# Altium PCB board.pcbdoc
Units mil, origin at the board's own origin, x right, y up, seen from the top; angles counter-clockwise.
Board outline 4446.21 x 3318.85 mil, 2 copper layers (Top Layer, Bottom Layer); 11 components, 21 nets, 99 pads, 5 vias.
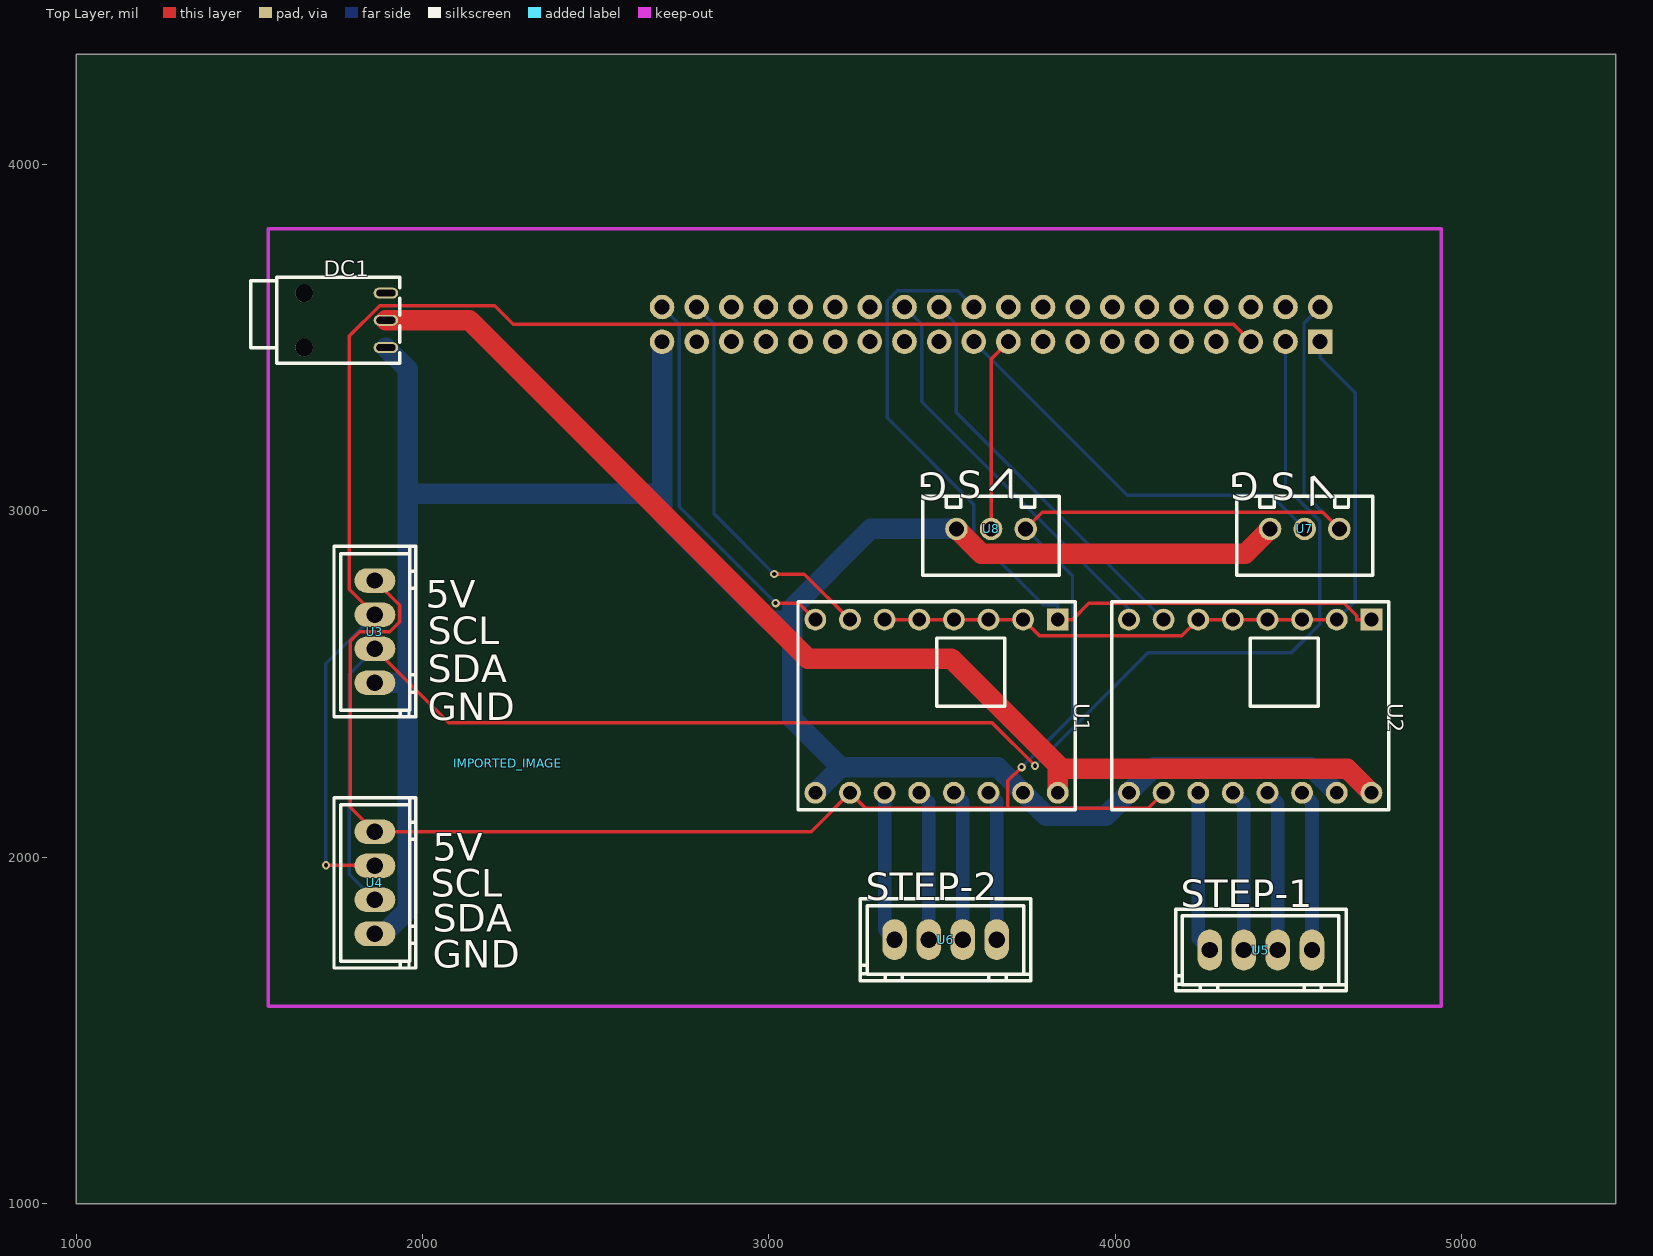
[diagram p0: Top Layer view]
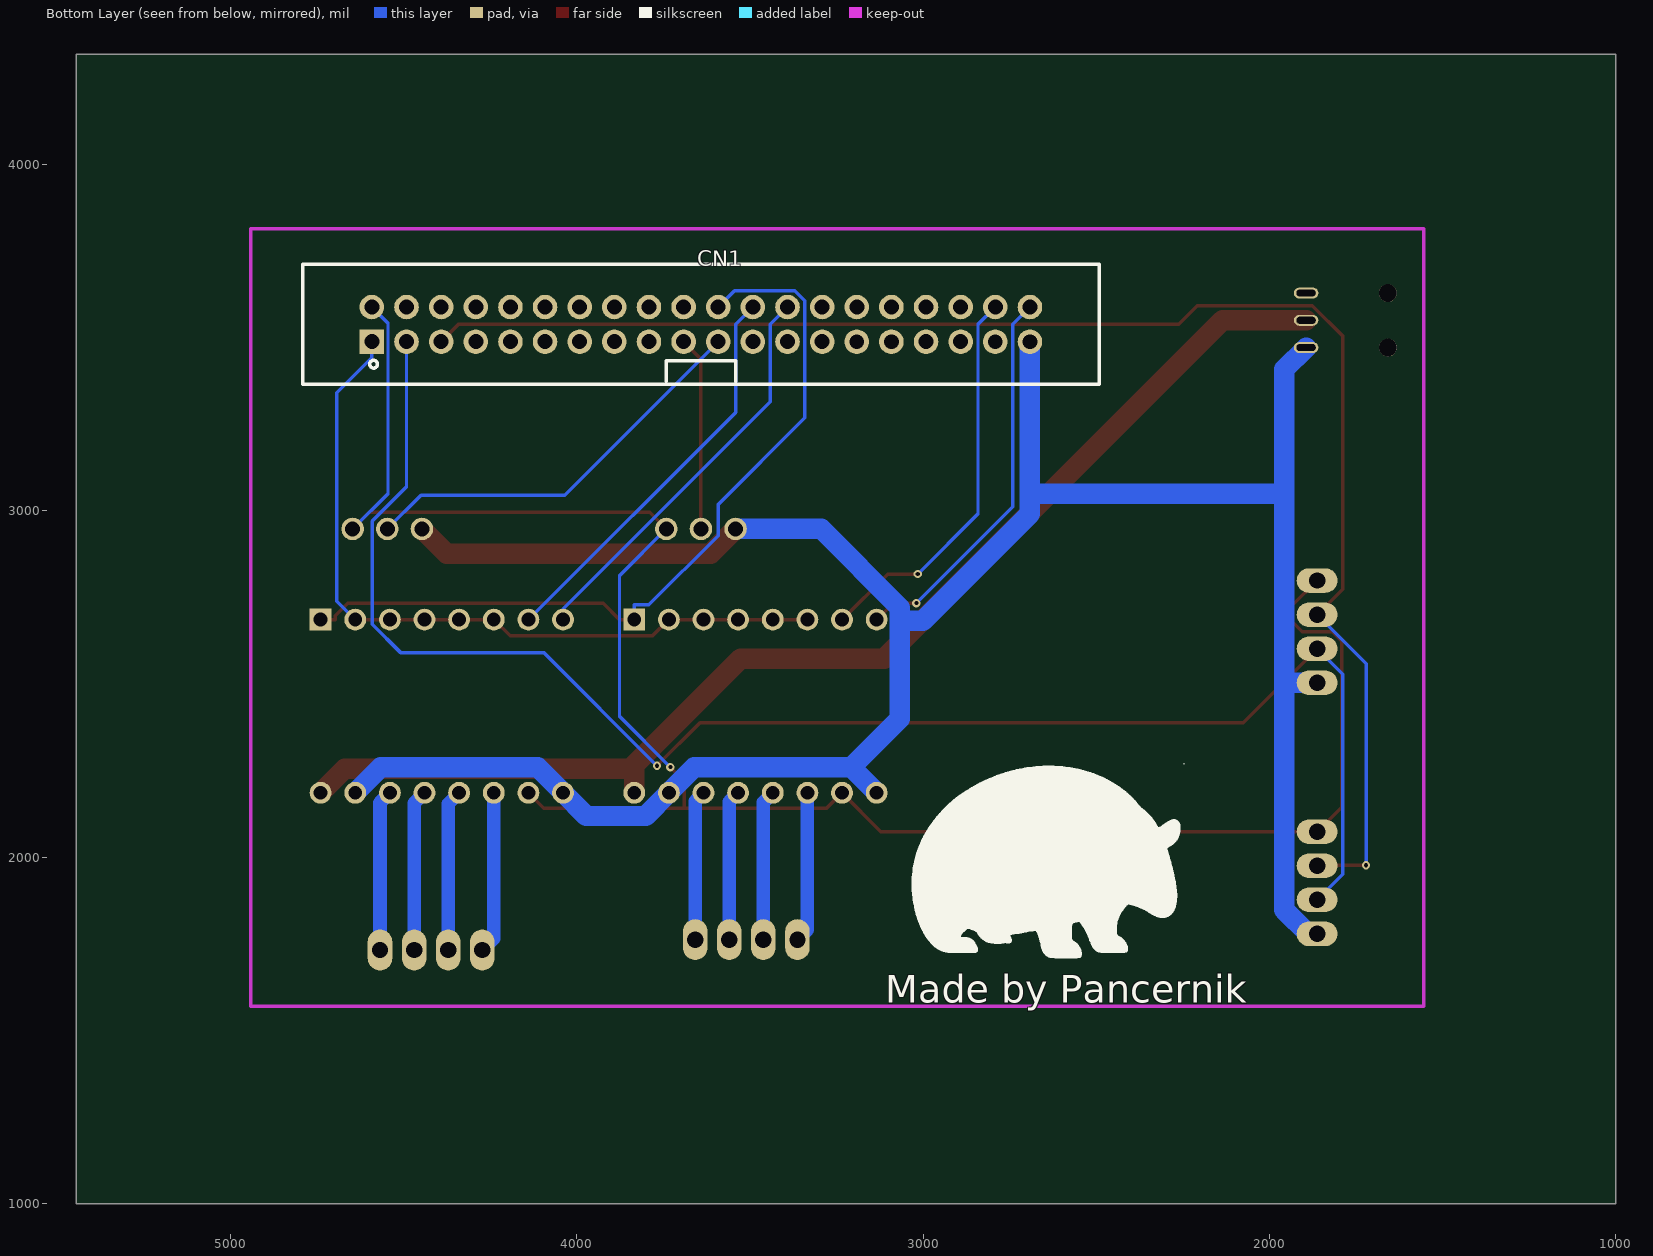
[diagram p1: Bottom Layer view, seen from below]

## Layer stack, top to bottom
Top Layer: signal copper (thickness not stored)
Dielectric: dielectric 12.6, FR-4, Dk 4.8
Bottom Layer: signal copper (thickness not stored)

## Board outline
5446.21,1000 1000,1000 1000,4318.85 5446.21,4318.85

## Components (designator, comment, footprint, x,y, rotation, side; value= is the part's Value field where it differs from the comment)
CN1 "RPi" CONN-TH_40P-P2.54_KINGHELM_KH-2.54PH180-2X20P-L8.9 3642,3538.3 r0 bottom
DC1 "DCConnector/DC-003A 3.5Jacks" DC-IN_DC-003A-3.5 1894.8,3550 r0 top
IMPORTED_IMAGE "IMPORTED_IMAGE" IMPORTED_IMAGE 2246.27,2271.38 r0 top
U1 "A4988" DIP-16_L20.3-W15.2-P2.54_LS12.7_A4988 3484.52,2435.9 r270 top
U2 "A4988" DIP-16_L20.3-W15.2-P2.54_LS12.7_A4988 4390.03,2435.9 r270 top
U3 "I2C-2" "JST 4 PIN" 1859.8,2650 r0 top
U4 "I2C-1" "JST 4 PIN" 1859.8,1925 r0 top
U5 "STEP-1" "JST 4 PIN" 4419.8,1735 r270 top
U6 "STEP-2" "JST 4 PIN" 3509.8,1765 r270 top
U7 "SENS-1" CONN-TH_XH2.54_3PIN 4547.51,2947.71 r0 top
U8 "SENS-2" CONN-TH_XH2.54_3PIN 3642,2947.71 r0 top

## Footprints (in the part's own frame and the unit in brackets; to place one, negate y for a bottom-side part, rotate by r counter-clockwise, add the part's x,y. Pads: shape width x height; smd on the part's side, far side on the other; paste and mask are expansions set on the pad)
CONN-TH_40P-P2.54_KINGHELM_KH-2.54PH180-2X20P-L8.9 [mm]
  rect 1.8x1.8 hole 1.1 paste+0 mask+0.051: 1(24.13,1.27)
  round 1.8 hole 1.1 paste+0 mask+0.051: 2(24.13,-1.27) 3(21.59,1.27) 4(21.59,-1.27) 5(19.05,1.27) 6(19.05,-1.27) 7(16.51,1.27) 8(16.51,-1.27) 9(13.97,1.27) 10(13.97,-1.27) 11(11.43,1.27) 12(11.43,-1.27) 13(8.89,1.27) 14(8.89,-1.27) 15(6.35,1.27) 16(6.35,-1.27) 17(3.81,1.27) 18(3.81,-1.27) 19(1.27,1.27) 20(1.27,-1.27) 21(-1.27,1.27) 22(-1.27,-1.27) 23(-3.81,1.27) 24(-3.81,-1.27) 25(-6.35,1.27) 26(-6.35,-1.27) 27(-8.89,1.27) 28(-8.89,-1.27) 30(-11.43,-1.27) 32(-13.97,-1.27) 33(-16.51,1.27) 34(-16.51,-1.27) 35(-19.05,1.27) 36(-19.05,-1.27) 38(-21.59,-1.27) 40(-24.13,-1.27)
  round 1.8 hole 1.082 paste+0 mask+0.051: 29(-11.43,1.27) 31(-13.97,1.27) 37(-21.59,1.27) 39(-24.13,1.27)
  silkscreen extent -29.2,-4.4 29.2,4.4
CONN-TH_XH2.54_3PIN [mm]
  round 1.65 hole 1.1 paste+0 mask+0.05: 1(-2.54,0) 2(0,0) 3(2.54,0)
  silkscreen extent -5,-3.4 5,2.4
DC-IN_DC-003A-3.5 [mm]
  oval 1.8x0.8 hole 0.5 slot 1.4 at 0 deg paste+0 mask+0.05: 1(0,-1.999)
  oval 1.8x0.8 hole 0.5 slot 1.399 at 0 deg paste+0 mask+0.05: 2(0,0) 3(0,2)
  round 1.3 hole 1.3 unplated paste+0: ""(-6,-1.999) ""(-6,1.999)
  silkscreen extent -9.9,-3.15 1,3.15
DIP-16_L20.3-W15.2-P2.54_LS12.7_A4988 [mm]
  rect 1.6x1.6 hole 1.02 paste+0 mask+0.05: 1(-6.35,8.89)
  round 1.6 hole 1.02 paste+0 mask+0.05: 2(-6.35,6.35) 3(-6.35,3.81) 4(-6.35,1.27) 5(-6.35,-1.27) 6(-6.35,-3.81) 7(-6.35,-6.35) 8(-6.35,-8.89) 9(6.35,-8.89) 10(6.35,-6.35) 11(6.35,-3.81) 12(6.35,-1.27) 13(6.35,1.27) 14(6.35,3.81) 15(6.35,6.35) 16(6.35,8.89)
  silkscreen extent -7.66,-10.16 7.58,10.16
IMPORTED_IMAGE [mil]
"JST 4 PIN" [mm]
  oval 3x1.8 hole 1.2 paste+0 mask+0.051: 1(0.079,-3.723) 2(0.079,-1.223) 3(0.079,1.277) 4(0.079,3.777)
  silkscreen extent -2.92,-6.22 3.08,6.28

## Via types
v1: diameter 24.02, hole 12.01, Top Layer to Bottom Layer, tented both sides, 5 vias

## Nets (pads, with @x,y where several pads share a name; then routed paths per layer and width w, separated by ;. In a path a pad name is that pad's centre, name@x,y a point inside that pad or via, vN(x,y) a via of type N, cw(c..) or ccw(c..) an arc to the next point about the centre after c; other vN are vias at no path point)
+5V: CN1.2 U1.10 U2.10 U3.4 U4.4 U7.3 U8.3 | length 5841.9
  Top Layer w10: U3.4 1934.63,2726.98 1934.63,2679.42 1906.27,2651.06 1818.97,2651.06 1792.04,2624.13 1792.04,2144.57 U4.4 3122.32,2073.7 U1.10 3279.29,2141.13 3690.49,2141.13 ; v1(3730.19,2259.94) 3690.49,2220.24 3690.49,2141.13 ; U8.3 3789.73,2995.44 4599.78,2995.44 U7.3 ; U2.10 4095.26,2141.13 3690.49,2141.13
  Bottom Layer w10: v1(3730.19,2259.94) 3877.08,2406.83 3877.08,2812.63 U8.3 ; CN1.2 4545.51,3541.81 4545.51,3049.71 U7.3
CN1_1: CN1.1 U1.2 U1.3 U1.4 U1.5 U1.6 U2.2 U2.3 U2.4 U2.5 U2.6 | length 2211.1
  Top Layer w10: U1.6 U1.5 U1.4 U1.3 U1.2 3781.67,2638.75 4192.88,2638.75 U2.6 U2.5 U2.4 U2.3 U2.2
  Bottom Layer w10: CN1.1 4592,3441.88 4693.43,3340.45 4693.43,2739.3 U2.2
CN1_3: CN1.3 U3.2 U4.2 | length 4680.3
  Top Layer w10: U3.2 2076.59,2388.17 3644.57,2388.17 v1(3769,2263.74)
  Bottom Layer w10: U4.2 1789.25,1950.51 1789.25,2528.19 U3.2 ; v1(3769,2263.74) 4096.09,2590.83 4509.24,2590.83 4591.05,2672.64 4591.05,2970.5 4492,3069.55 CN1.3
CN1_5: CN1.5 U3.3 U4.3 | length 4440.9
  Top Layer w10: v1(1721.57,1976.86) 1861.32,1976.86 U4.3 ; U3.3 1789.36,2773.82 1789.36,3504.85 1876.77,3592.26 2208.43,3592.26 2262.4,3538.29 4342.01,3538.29 CN1.5
  Bottom Layer w10: v1(1721.57,1976.86) 1721.57,2558.93 U3.3
CN1_19: CN1.19 U8.2 | length 561.3
  Top Layer w10: U8.2 3642,3438.3 CN1.19
CN1_21: CN1.21 U7.2 | length 1179.4
  Bottom Layer w10: CN1.21 4035.14,3045.16 4450.06,3045.16 U7.2
CN1_22: CN1.22 U1.1 U2.1 | length 2381
  Top Layer w10: U1.1 3877.01,2685.9 3923.66,2732.55 4661.51,2732.55 4697.54,2696.52 4697.54,2685.9 U2.1
  Bottom Layer w10: CN1.22 3545,3635.3 3371.29,3635.3 3342,3606.01 3342,3268.32 3592,3018.32 3592,2928.42 3792.03,2728.39 3834.52,2728.39 U1.1
CN1_24: CN1.24 U2.7 | length 1170.8
  Bottom Layer w10: CN1.24 3542,3538.3 3542,3283.93 U2.7
CN1_26: CN1.26 U2.8 | length 1170.8
  Bottom Layer w10: CN1.26 3442,3538.3 3442,3315.01 4040.03,2716.98 U2.8
CN1_38: CN1.38 U1.7 | length 1136.7
  Top Layer w10: v1(3015.94,2817.36) 3103.06,2817.36 U1.7
  Bottom Layer w10: CN1.38 2842,3538.3 2842,2991.3 v1(3015.94,2817.36)
CN1_40: CN1.40 U1.8 | length 1125
  Top Layer w10: v1(3019.85,2733.41) 3087.01,2733.41 U1.8
  Bottom Layer w10: CN1.40 2742,3538.3 2742,3011.26 v1(3019.85,2733.41)
GND: CN1.39 DC1.1 U1.9 U1.15 U2.9 U2.15 U3.1 U4.1 U7.1 U8.1 | length 7338.4
  Top Layer w59.05: U8.1 3614.2,2875.51 4375.31,2875.51 U7.1
  Bottom Layer w59.05: U4.1 1888.54,1778.42 1957.54,1847.42 1957.54,2503.42 ; U3.1 1957.54,2503.42 ; DC1.1 1957.54,3408.52 1957.54,3049.88 ; CN1.39 2692,3049.88 ; U1.9 3207.87,2259.25 ; U8.1 3294.69,2947.71 3067.44,2720.46 3067.44,2681.93 ; U2.15 4566.68,2259.25 4113.38,2259.25 U2.9 3972.95,2118.82 3801.6,2118.82 U1.15 3661.17,2259.25 3207.87,2259.25 ; 1957.54,2503.42 1957.54,3049.88 ; 1957.54,3049.88 2692,3049.88 ; 2692,3049.88 2692,2991.82 3001.89,2681.93 3067.44,2681.93 ; 3067.44,2681.93 3067.44,2399.68 3207.87,2259.25
U5_1: U2.11 U5.1 | length 467.8
  Bottom Layer w39.37: U2.11 4240.03,1765.08 U5.1
U5_2: U2.12 U5.2 | length 467.1
  Bottom Layer w39.37: U2.12 4371.65,2154.28 U5.2@4371.65,1731.89
U5_3: U2.13 U5.3 | length 466.5
  Bottom Layer w39.37: U2.13 4470.07,2155.86 U5.3
U5_4: U2.14 U5.4 | length 465.8
  Bottom Layer w39.37: U2.14 4568.5,2157.43 U5.4
U6_1: U1.11 U6.1 | length 435.9
  Bottom Layer w39.37: U1.11 3334.52,1790.59 U6.1
U6_2: U1.12 U6.2 | length 435.2
  Bottom Layer w39.37: U1.12 3461.65,2158.77 U6.2@3461.65,1761.89
U6_3: U1.13 U6.3 | length 434.6
  Bottom Layer w39.37: U1.13 3560.07,2160.35 U6.3
U6_4: U1.14 U6.4 | length 433.9
  Bottom Layer w39.37: U1.14 3658.5,2161.92 U6.4
VCC: DC1.2 U1.16 U2.16 | length 3485.7
  Top Layer w59.05: DC1.2 2135.96,3550 3112.46,2573.5 3526.55,2573.5 3835.05,2265 3835.05,2255.64 ; U1.16 3835.05,2186.43 3835.05,2255.64 ; U2.16 4670.29,2255.64 3835.05,2255.64
pads on no net: CN1.4 CN1.6 CN1.7 CN1.8 CN1.9 CN1.10 CN1.11 CN1.12 CN1.13 CN1.14 CN1.15 CN1.16 CN1.17 CN1.18 CN1.20 CN1.23 CN1.25 CN1.27 CN1.28 CN1.29 CN1.30 CN1.31 CN1.32 CN1.33 CN1.34 CN1.35 CN1.36 CN1.37 DC1. DC1.3

## Silkscreen, mask and mechanical layers (free items; w line width, h text height)
Top Overlay:
  text "S" at 3614.8,3115 h80 r180
  text "V" at 4605.47,3112.34 h80 r201
  text "G" at 3514.8,3110 h80 r180
  text "G" at 4414.8,3110 h80 r180
  text "S" at 4519.8,3110 h80 r180
  text "V" at 3734.13,3107.34 h80 r159
  text "5V" at 2009.8,2720 h80
  text "SCL" at 2014.8,2615 h80
  text "SDA" at 2014.8,2505 h80
  text "GND" at 2014.8,2395 h80
  text "5V" at 2029.8,1990 h80
  text "SCL" at 2024.8,1885 h80
  text "STEP-2" at 3279.8,1875 h80
  text "STEP-1" at 4189.8,1855 h80
  text "SDA" at 2029.8,1785 h80
  text "GND" at 2029.8,1680 h80
Bottom Overlay:
  text "Made by Pancernik" at 3109.8,1580 h80